# Altium PCB sample.PcbDoc (part 1 of 2)
Units mm, origin at the board's own origin, x right, y up, seen from the top; angles counter-clockwise.
Board outline 130.3 x 75.3 mm, 2 copper layers (Top Layer, Bottom Layer); 117 components, 130 nets, 510 pads, 338 vias.
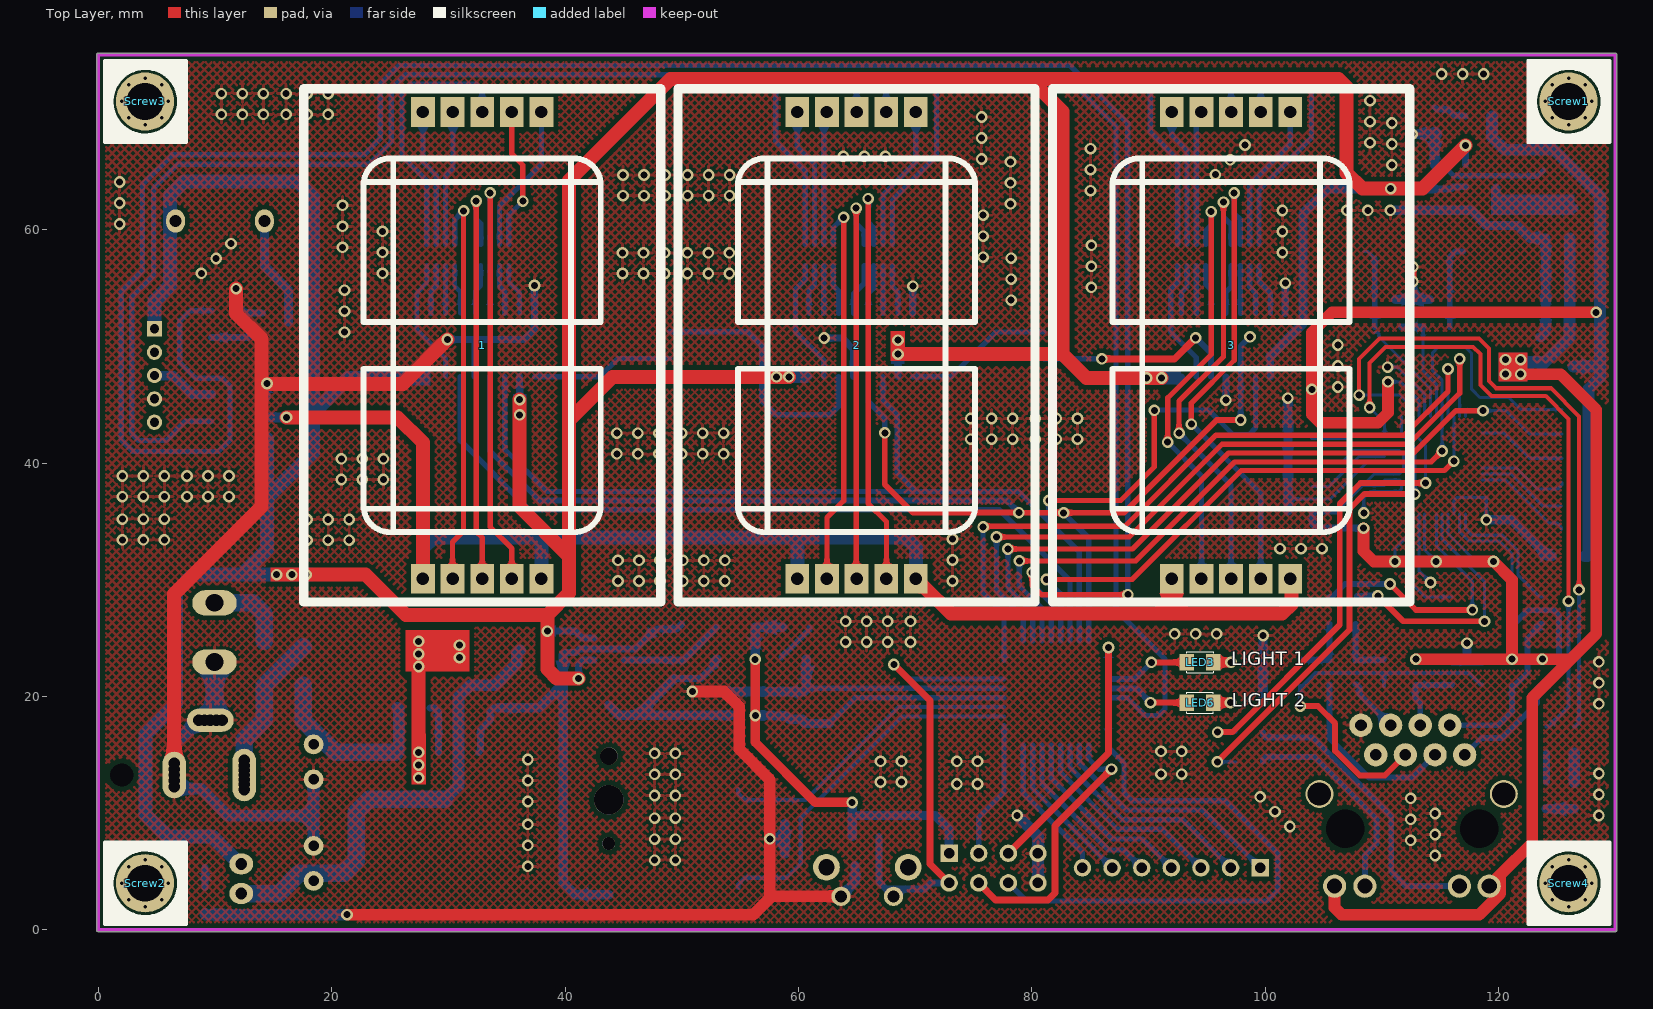
[diagram p0: Top Layer view]
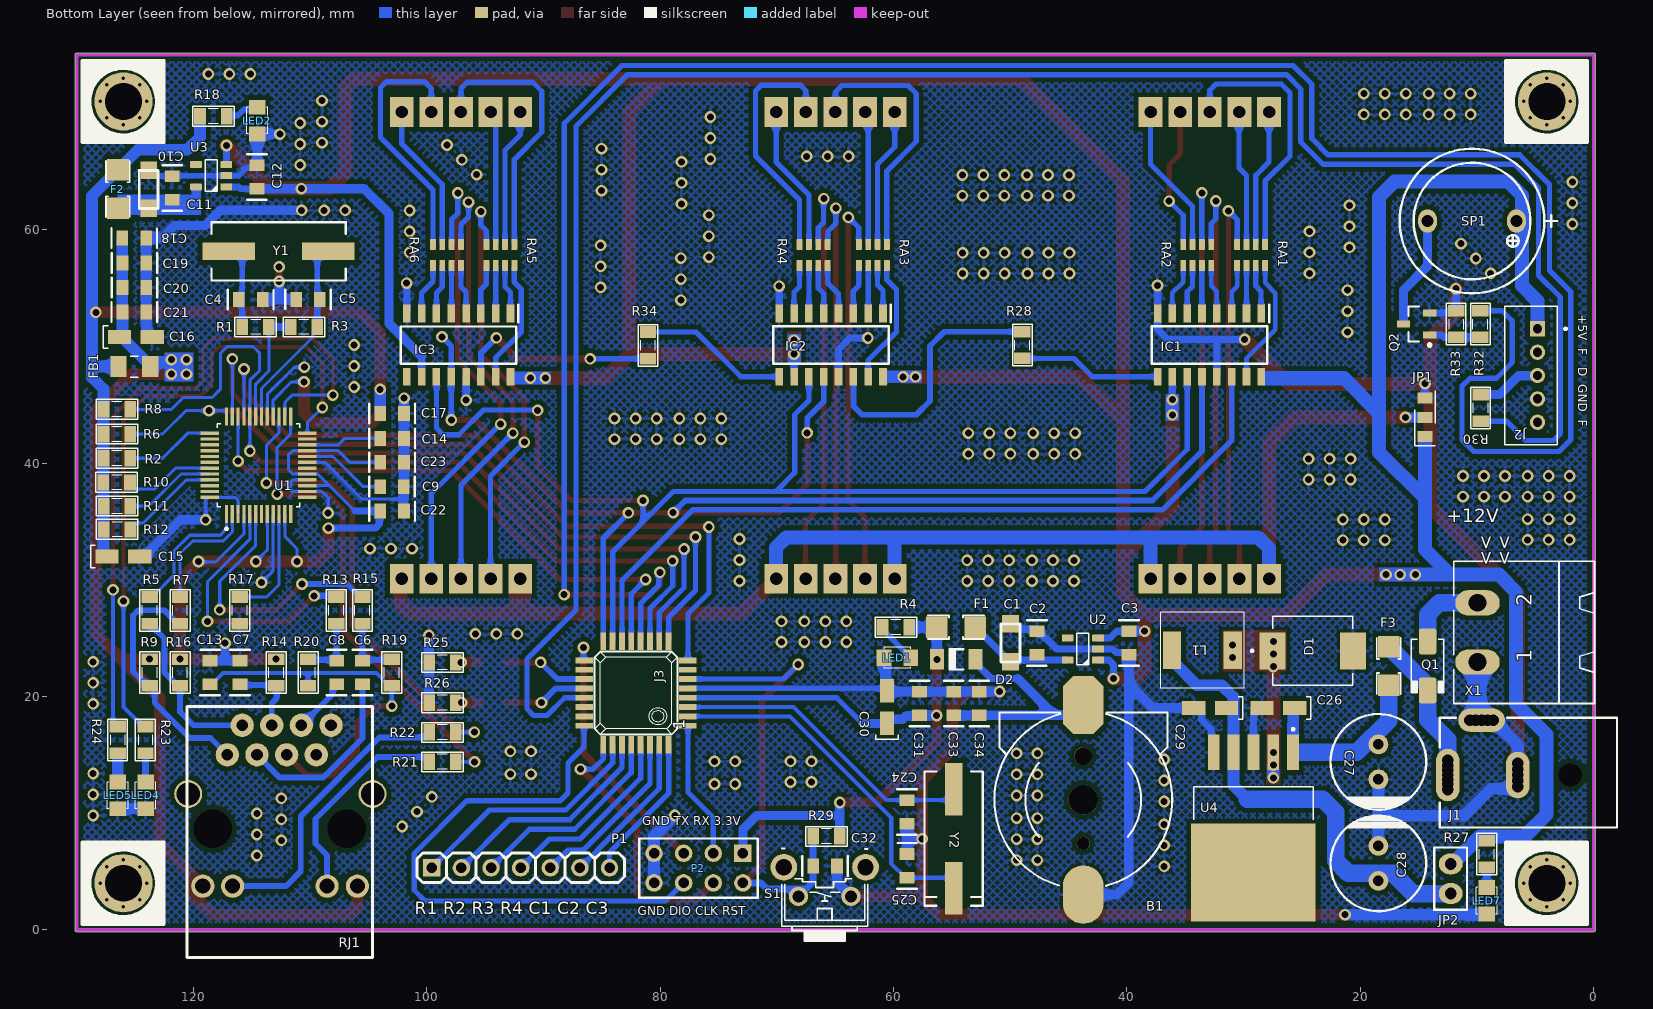
[diagram p1: Bottom Layer view, seen from below]

## Layer stack, top to bottom
Top Solder: solder mask 0.0102, Solder Resist, Dk 3.5
Top Layer: signal copper 0.0356
Dielectric 1: dielectric 0.32, FR-4, Dk 4.8
Bottom Layer: signal copper 0.0356
Bottom Solder: solder mask 0.0102, Solder Resist, Dk 3.5

## Board outline
0,-0.15 cw(c0,0) -0.15,0 -0.15,75 cw(c0,75) 0,75.15 130,75.15 cw(c130,75) 130.15,75 130.15,0 cw(c130,0) 130,-0.15

## Design rules (kind name [scope] priority, off if disabled: settings)
Clearance polygon [InPolygon] p1: gap=0.4 ignorepadtopadclearanceinfootprint=FALSE
Clearance [All] p2: gap=0.2 ignorepadtopadclearanceinfootprint=FALSE except(0: Arc-Hole Track-Hole SMDPad-Hole THPad-Hole Via-Hole Fill-Hole Poly-Hole Region-Hole Text-Hole)
PolygonConnect [All] p1: connectstyle=Relief reliefconductorwidth=0.254 reliefentries=4 polygonreliefangle="90 Angle" airgapwidth=0.254
RoutingVias [All] p1: holewidth=0.6 width=1 viastyle="Through Hole" minholewidth=0.5 minwidth=1 maxholewidth=0.6 maxwidth=1.27
SolderMaskExpansion [All] p1: expansion=0.102 istentingtop=FALSE
SupplyNets "Schematic Supply Nets_10" [InNet('COM')] p1: voltage=0.000
SupplyNets "Schematic Supply Nets_9" [InNet('FB')] p2: voltage=0.000
SupplyNets "Schematic Supply Nets_8" [InNet('+3.3v')] p3: voltage=0.000
SupplyNets "Schematic Supply Nets_7" [InNet('3.3A')] p4: voltage=0.000
SupplyNets "Schematic Supply Nets_4" [InNet('+3.3')] p5: voltage=0.000
SupplyNets "Schematic Supply Nets_3" [InNet('GND')] p6: voltage=0.000
SupplyNets "Schematic Supply Nets_2" [InNet('+5')] p7: voltage=0.000
SupplyNets "Schematic Supply Nets" [InNet('+12')] p8: voltage=0.000
Width [All] p1: maxlimit=2 minlimit=0.254 preferedwidth=0.6
30 further rules are at their usual default settings.

## Components (designator, comment, footprint, x,y, rotation, side; value= is the part's Value field where it differs from the comment)
1 "7Seg 1Digit - THD - Com Anode - Red - 44x30mm - 15011BS/BH" "LED 7SEG 30x44" 32.895,50.1 r0 top locked
2 "7Seg 1Digit - THD - Com Anode - Red - 44x30mm - 15011BS/BH" "LED 7SEG 30x44" 64.98,50.1 r0 top locked
3 "7Seg 1Digit - THD - Com Anode - Red - 44x30mm - 15011BS/BH" "LED 7SEG 30x44" 97.08,50.1 r0 top locked
B1 "Batt Holder CR1220 - 1 Cell - Pressure Contacts 12.5mm - SMD" my_smd_bat 43.836,11.024 r180 bottom locked
C1 "Cap Tantal - 100nF - 6V size A" MY_CAP_SMD-A 49.977,24.592 r90 bottom value=3300u
C2 "Cap 1uF - 50V - 10% - 0805 - Samsung Electronics" C0805 47.71,24.592 r270 bottom value=33p
C3 "Cap 1uF - 50V - 10% - 0805 - Samsung Electronics" C0805 39.832,24.592 r90 bottom value=33p
C4 "Cap 22pF - 50V - 5% - 0805 - CCTC" C0805 115.093,54.029 r180 bottom value=33p
C5 "Cap 22pF - 50V - 5% - 0805 - CCTC" C0805 110.182,54.029 r0 bottom value=33p
C6 "Cap 6.8nF - 50V - 10% - 0805 - Fenghua" C0805 105.523,22.062 r90 bottom value=33p
C7 "Cap 22nF - 50V - 10% - 0805 - Fenghua" C0805 116.026,22.062 r90 bottom value=33p
C8 "Cap 6.8nF - 50V - 10% - 0805 - Fenghua" C0805 107.728,22.062 r90 bottom value=33p
C9 "Cap 4.7uF - 50V - 10% - 0805 - TDK" C0805 102.983,37.985 r0 bottom value=33p
C10 "Cap Tantal - 100nF - 6V size A" MY_CAP_SMD-A 123.85,63.475 r90 bottom value=3300u
C11 "Cap 1uF - 50V - 10% - 0805 - Samsung Electronics" C0805 121.825,63.59 r270 bottom value=33p
C12 "Cap 1uF - 50V - 10% - 0805 - Samsung Electronics" C0805 114.548,64.525 r270 bottom value=33p
C13 "Cap 10nF - 50V - 10% - 0805 - Fenghua" C0805 118.585,22.062 r90 bottom value=33p
C14 "Cap 10nF - 50V - 10% - 0805 - Fenghua" C0805 102.976,42.115 r0 bottom value=33p
C15 "Cap Tantal - 10uF - 6V size A" "CAPP 1206 (3216X18L) Size A" 127.414,32.019 r180 bottom value=10uF
C16 "Cap Tantal - 10uF - 6V size A" "CAPP 1206 (3216X18L) Size A" 126.336,50.795 r180 bottom value=10uF
C17 "Cap 100nF - 50V - 10% - 0805 - Samsung Electronics" C0805 102.973,44.27 r180 bottom value=33p
C18 "Cap 100nF - 50V - 10% - 0805 - Samsung Electronics" C0805 125.076,59.291 r180 bottom value=33p
C19 "Cap 100nF - 50V - 10% - 0805 - Samsung Electronics" C0805 125.062,57.17 r180 bottom value=33p
C20 "Cap 100nF - 50V - 10% - 0805 - Samsung Electronics" C0805 125.061,55.054 r180 bottom value=33p
C21 "Cap 100nF - 50V - 10% - 0805 - Samsung Electronics" C0805 125.068,52.969 r180 bottom value=33p
C22 "Cap 100nF - 50V - 10% - 0805 - Samsung Electronics" C0805 102.978,35.908 r180 bottom value=33p
C23 "Cap 100nF - 50V - 10% - 0805 - Samsung Electronics" C0805 102.977,40.078 r180 bottom value=33p
C24 "Cap 22pF - 50V - 5% - 0805 - CCTC" C0805 58.839,10.106 r270 bottom value=33p
C25 "Cap 22pF - 50V - 5% - 0805 - CCTC" C0805 58.839,5.486 r90 bottom value=33p
C26 "TANTALUM CAPACITOR 100NF 35V 10% SMD A" "CAPP 1206 (3216X18L) Size A" 25.617,19.028 r0 bottom value=100nF
C27 "470UF 16V-6.3*12-105C-BLACK" Cap-Ele-03. 18.445,14.401 r270 bottom value=470uF
C28 "470UF 16V-6.3*12-105C-BLACK" Cap-Ele-03. 18.445,5.699 r90 bottom value=470uF
C29 "TANTALUM CAPACITOR 100NF 35V 10% SMD A" "CAPP 1206 (3216X18L) Size A" 31.464,19.028 r0 bottom value=100nF
C30 "Cap Tantal - 22uF - 6V size A" "CAPP 1206 (3216X18L) Size A" 60.55,17.7 r90 bottom value=22uF
C31 "Cap 100nF - 50V - 10% - 0805 - Samsung Electronics" C0805 57.775,19.4 r90 bottom value=33p
C32 "Cap 1nF - 50V - 10% - 0805" C0805 65.869,5.486 r180 bottom value=33p
C33 "Cap 100nF - 50V - 10% - 0805 - Samsung Electronics" C0805 54.841,19.4 r90 bottom value=33p
C34 "Cap 1uF - 50V - 10% - 0805 - Samsung Electronics" C0805 52.654,19.4 r90 bottom value=33p
D1 "SS34 SM5822 SMC" DIOM7959X265N 24.07,23.911 r180 bottom
D2 "1N4148" LL4148 54.643,23.188 r0 bottom
F1 "F=1.0 A" "1206 FUSE" 54.643,25.937 r0 bottom
F2 "F=1.0 A" "1206 FUSE" 126.473,63.483 r90 bottom
F3 "F=1.0 A" "1206 FUSE" 17.563,22.619 r270 bottom
FB1 "Ferrite Beads 220Ω 2A 0805 25% - Murata Manufacturing" BEADC3216X130N 125.061,48.286 r180 bottom
IC1 "74HC595D" SOIC127P600X175-16N 32.925,50.125 r270 bottom locked
IC2 "74HC595D" SOIC127P600X175-16N 65.35,50.125 r270 bottom locked
IC3 "74HC595D" SOIC127P600X175-16N 97.275,50.113 r270 bottom locked
J1 "Conn DC005-2.5 - Right-Angle DC Power Receptacle - THD" "Power Jack" -2,13.275 r0 bottom
J2 "Conn B5B-PH-K-S" JST_B5B-PH-K-S 5.355,47.512 r90 bottom
J3 "IC MCU - STM32G070KBT - SMD - LQFP-32 - STMicroelectronics" QFP32_STM32 82.075,20.3 r90 bottom
JP1 "Jumper" "Jumper Selector SMD" 14.45,43.925 r90 bottom
JP2 "PIN HEADER 1*2 MALE ST 2.54MM" "Jumper Small - 2.54 - GRAY" 12.244,4.386 r90 bottom
L1 "INDUCTOR TMPC0603H 33UH 7.3*6.6*2.8 SMD" PCBComponent_1 33.404,23.909 r0 bottom
LED1 "LED Red - 0805 - XINGLIGHT" LED-0805-Red 58.52,23.334 r0 bottom value="LED 3 - 5 ly 2 Colour"
LED2 "LED Red - 0805 - XINGLIGHT" LED-0805-Red 114.525,70.5 r270 bottom value="LED 3 - 5 ly 2 Colour"
LED3 "LED Red - 0805 - XINGLIGHT" LED-0805-Green 93.273,22.937 r0 top value="LED 3 - 5 ly 2 Colour"
LED4 "LED Red - 0805 - XINGLIGHT" LED-0805-Red 124.103,12.674 r270 bottom value="LED 3 - 5 ly 2 Colour"
LED5 "LED Green - 0805 - XINGLIGHT" LED-0805-Red 126.494,12.674 r270 bottom value="LED 3 - 5 ly 2 Colour"
LED6 "LED Green - 0805 - XINGLIGHT" LED-0805-Blue 93.273,19.477 r0 top value="LED 3 - 5 ly 2 Colour"
LED7 "LED SMD 0805 RED" LED-0805-Red 9.15,3.644 r270 bottom value="LED 3 - 5 ly 2 Colour"
P1 "Conn PinHeader - 1x7 - 2.54mm  - THD" MHDR1X07-254P 99.58,5.325 r180 bottom
P2 "Conn PinHeader Female - 2x4 - 2.54mm - THD" HDR2X4 72.91,6.565 r0 bottom
Q1 "Diode Schottky - SS14 - SMA - Jingdao Microelectronics" DO-214AC 14.224,22.619 r270 bottom
Q2 "Trans NPN - 2SC945 - SOT-23" SOT23_BEC_N 15.171,51.925 r0 bottom
R1 "Res 0ohm - 5% - 0805" RES-SMD-0805 114.679,51.679 r180 bottom
R2 "Res 10K - 1% - 0805" RES-SMD-0805 126.567,40.421 r180 bottom
R3 "Res 1M - 1% - 0805" RES-SMD-0805 110.532,51.679 r180 bottom
R4 "Res 2.2K - 5% - 0805" RES-SMD-0805 59.798,25.937 r180 bottom
R5 "Res 33ohm - 1% - 0805" RES-SMD-0805 123.751,27.387 r90 bottom
R6 "Res 10K - 1% - 0805" RES-SMD-0805 126.567,42.492 r0 bottom
R7 "Res 33ohm - 1% - 0805" RES-SMD-0805 121.15,27.387 r90 bottom
R8 "Res 10K - 1% - 0805" RES-SMD-0805 126.567,44.611 r0 bottom
R9 "Res 49.9ohm - 1% - 0805" RES-SMD-0805 123.751,22.062 r90 bottom
R10 "Res 10K - 1% - 0805" RES-SMD-0805 126.578,38.343 r0 bottom
R11 "Res 10K - 1% - 0805" RES-SMD-0805 126.553,36.318 r0 bottom
R12 "Res 10K - 1% - 0805" RES-SMD-0805 126.54,34.313 r0 bottom
R13 "Res 33ohm - 1% - 0805" RES-SMD-0805 107.764,27.387 r90 bottom
R14 "Res 10ohm - 1% - 0805" RES-SMD-0805 112.907,22.062 r90 bottom
R15 "Res 33ohm - 1% - 0805" RES-SMD-0805 105.523,27.387 r90 bottom
R16 "Res 49.9ohm - 1% - 0805" RES-SMD-0805 121.15,22.062 r90 bottom
R17 "Res 12.4K - 1% - 0805" RES-SMD-0805 116.037,27.387 r270 bottom
R18 "Res 2.2K - 5% - 0805" RES-SMD-0805 118.3,69.725 r0 bottom
R19 "Res 49.9ohm - 1% - 0805" RES-SMD-0805 103.007,22.062 r90 bottom
R20 "Res 49.9ohm - 1% - 0805" RES-SMD-0805 110.192,22.062 r90 bottom
R21 "Res 330ohm - 1% - 0805" RES-SMD-0805 98.663,14.404 r180 bottom
R22 "Res 330ohm - 1% - 0805" RES-SMD-0805 98.663,16.931 r180 bottom
R23 "Res 1K - 1% - 0805" RES-SMD-0805 124.116,16.286 r270 bottom
R24 "Res 1K - 1% - 0805" RES-SMD-0805 126.494,16.286 r270 bottom
R25 "Res 220ohm - 5% - 0805" RES-SMD-0805 98.663,22.924 r180 bottom
R26 "Res 220ohm - 5% - 0805" RES-SMD-0805 98.663,19.477 r180 bottom
R27 "RESISTOR 1KOHMS 0805 1% SMD" RES-SMD-0805 9.15,6.5 r270 bottom
R28 "Res 0ohm - 5% - 0805" RES-SMD-0805 48.967,50.125 r90 bottom locked
R29 "Res 4.7K - 5% - 0805 - VO Sub Brand (ER)" RES-SMD-0805 65.751,8.015 r180 bottom
R30 "Res 0ohm - 5% - 0805" RES-SMD-0805 9.686,44.743 r270 bottom
R32 "Res 4.7K - 5% - 0805 - VO Sub Brand (ER)" RES-SMD-0805 9.711,51.925 r90 bottom
R33 "Res 47K - 5% - 0805 - VO Sub Brand (ER)" RES-SMD-0805 11.779,51.925 r270 bottom
R34 "Res 0ohm - 5% - 0805" RES-SMD-0805 81.038,50.1 r270 bottom locked
RA1 "Res 220ohm Array - 4Pack - SMD" RESCAXS50P160X320X70-8N 29.35,57.85 r90 bottom value=220ohm
RA2 "Res 220ohm Array - 4Pack - SMD" RESCAXS50P160X320X70-8N 33.975,57.85 r90 bottom value=220ohm
RA3 "Res 220ohm Array - 4Pack - SMD" RESCAXS50P160X320X70-8N 61.775,57.85 r90 bottom value=220ohm
RA4 "Res 220ohm Array - 4Pack - SMD" RESCAXS50P160X320X70-8N 66.85,57.85 r90 bottom value=220ohm
RA5 "Res 220ohm Array - 4Pack - SMD" RESCAXS50P160X320X70-8N 93.7,57.85 r90 bottom value=220ohm
RA6 "Res 220ohm Array - 4Pack - SMD" RESCAXS50P160X320X70-8N 98.275,57.85 r90 bottom value=220ohm
RJ1 "Conn Ethernet RJ-45 - HR911105A - Single - Right Angle - HanRun" MY_rj45_8PIN 121.15,32.45 r0 bottom locked
S1 "Switch Tactile KFC - THD- 4pin - 6*6*9.5 - RA" THT_ALPS_SKHHLMA010 65.9,2.875 r180 bottom
Screw1 "NC" Screw 126,71 r0 top locked
Screw2 "NC" Screw 4,4 r0 top locked
Screw3 "NC" Screw 4,71 r0 top locked
Screw4 "NC" Screw 126,4 r0 top locked
SP1 "Buzzer Piezo TMB12A05 - 5V - 9mm - THD - Active" "BUZZER 7.62mm DC" 10.425,60.75 r0 bottom locked
U1 "IC Ethernet - W5500 - LQFP-48 - WIZnet" QFP50P900X900X160-48N 114.425,39.825 r90 bottom locked
U2 "Reg - SMD - TLV74333PDBVR - 3.3V - SOT-23-5 - Texas Instruments" SOT23-5 43.782,24.067 r0 bottom
U3 "Reg - SMD - TLV74333PDBVR - 3.3V - SOT-23-5 - Texas Instruments" SOT23-5 118.485,64.64 r0 bottom
U4 "LM2596S-5V/NOPB" CONV_LM2596DSADJG 29.158,8.733 r270 bottom
X1 "CON_Phoenix_MSTBA_02" CON_MSTBA02 9.95,25.49 r90 bottom
Y1 "Crystal 25MHz - HC-49SMD - SMD" "Crystal SMD"#1 112.707,58.154 r180 bottom value="12 MHz"
Y2 "Crystal 8MHz - HC-49S - SMD - YXC" "Crystal SMD"#2 54.841,7.258 r90 bottom value="11.0592 MHz"

## Footprints (in the part's own frame and the unit in brackets; to place one, negate y for a bottom-side part, rotate by r counter-clockwise, add the part's x,y. Pads: shape width x height; smd on the part's side, far side on the other; paste and mask are expansions set on the pad)
"1206 FUSE" [mm] "Fast Acting Smd 1206 non-Resettable Fuse Chip For Pcb Board-Design:Abbas Basereh"
  rect 1.85x1.85 smd: 1(-1.65,0) 2(1.65,0)
  silkscreen extent -2.41,-1.02 2.41,1.02, body extent -1.6,-0.8 1.6,0.8, height 1
BEADC3216X130N [mm]
  rect 1.4x1.82 smd: 1(-1.36,0) 2(1.36,0)
  silkscreen extent -0.34,-0.9 0.34,0.9
"BUZZER 7.62mm DC" [mm] "BUZZER 12mm DIA , 7.62mm pitch DESIGNER ABBAS BASEREH"
  oval 1.6x2 hole 1: 1(-3.81,0) 2(3.81,0)
  silkscreen extent -7.3,-6.2 6.2,6.2, body extent -6,-6 6,6, height 9.5
C0805 [mm] "Chip Resistor; Body 2.0 x 1.3 mm (LxW typ)"
  rect 1x1.27 smd: 1(-1.016,0) 2(1.016,0)
  silkscreen extent -1.96,-0.84 1.96,0.84, body extent -1,-0.62 1,0.63, height 0.78
Cap-Ele-03. [mm]
  round 1.7 hole 0.9: 1(-1.5,0) 2(1.5,0)
  silkscreen extent -4.1,-4.1 4.1,4.1, body extent -4.1,-4.1 4.1,4.1, height 14.65
"CAPP 1206 (3216X18L) Size A" [mm] "Chip Capacitor, 2-Leads, Body 3.2x1.6mm, IPC High Density, chip Tantalum"
  rect 1.999x1.199 smd: 1(0,0) 2(2.8,0)
  silkscreen extent -1.38,-0.97 -0.99,0.97, body extent -0.43,-0.9 3.21,0.9, height 1.8
CON_MSTBA02 [mil]
  oval 85x150 hole 60: 1(-100,0) 2(100,0)
  silkscreen extent -240,-395 240,80, body extent -240,-392 239,80, height 340
CONV_LM2596DSADJG [mm]
  rect 3.05x1.016 smd: 1(-6.485,3.404) 2(-6.485,1.702) 3(-6.485,0) 4(-6.485,-1.702) 5(-6.485,-3.404)
  rect 8.38x10.66 smd paste-6: 6(3.82,0)
  silkscreen extent -8.56,-5.12 -0.69,5.12, body extent -7.1,-5.07 7.1,5.07, height 4.57
"Crystal SMD"#1 [mm] "DESIGNER ABBAS BASEREH"
  rect 4.5x1.5 smd: 1(-4.25,0) 2(4.25,0)
  silkscreen extent -5.75,-2.5 5.75,2.5, body extent -6.21,-2.25 6.09,2.25, height 5.18
"Crystal SMD"#2 [mm]
  rect 4.5x1.5 smd: 1(-3.683,0) 2(4.817,0)
  silkscreen extent -5.18,-2.5 6.32,2.5, body extent -5.64,-2.25 6.66,2.25, height 5.18
DIOM7959X265N [mm]
  rect 2.25x3.18 smd: A(3.455,0) C(-3.455,0)
  silkscreen extent -5.3,-2.95 3.44,2.95, body extent -3.98,-2.95 3.98,2.95, height 1.2
DO-214AC [mm] "JEDEC DO214 variation AC. SMA"
  round 0.508 on Mech15: 0(0,0)
  rrect25% 2.2x1.5 smd: A(-2.1,0) K(2.1,0)
  silkscreen extent -2.3,-1.4 2.3,1.4, body extent -2.6,-1.3 2.6,1.3, height 2.42
HDR2X4 [mm] "Connector; Header; 4x2 Position"
  rect 1.5x1.5 hole 0.9: 1(0,0)
  round 1.5 hole 0.9: 2(0,2.54) 3(2.54,0) 4(2.54,2.54) 5(5.08,0) 6(5.08,2.54) 7(7.62,0) 8(7.62,2.54)
  silkscreen extent -1.27,-1.27 8.89,3.81
JST_B5B-PH-K-S [mm]
  rect 1.308x1.308 / inner round 1.308 / far side rect 1.308x1.308 hole 0.8: 1(4,-0.55)
  round 1.308 hole 0.8: 2(2,-0.55) 3(0,-0.55) 4(-2,-0.55) 5(-4,-0.55)
  silkscreen extent -5.95,-3.05 5.95,2.25
"Jumper Selector SMD" [mm]
  rect 0.95x1.3 smd: 1(-1.65,0) 2(0,0) 3(1.65,0)
  silkscreen extent -2.41,-0.89 2.29,0.89, body extent -1.85,-0.64 0.18,0.64, height 0.6
"Jumper Small - 2.54 - GRAY" [mil]
  oval 70x80 hole 40: 1(-50,0) 2(50,0)
  silkscreen extent -105,-55 105,55, body extent -100,-50 100,50, height 337
"LED 7SEG 30x44" [mil]
  rect 80x100 hole 42: 1(-200,-787.4) 2(-100,-787.4) 3(0,-787.4) 4(100,-787.4) 5(200,-787.4) 6(200,787.4) 7(100,787.4) 8(0,787.4) 9(-100,787.4) 10(-200,787.4)
  silkscreen extent -602,-866 602,866, body extent -602,-866 602,866, height 354
LED-0805-Blue [mil]
  rect 50x55 smd: 1(0,0) 2(90,0)
  silkscreen extent 0,-35 90,35, body extent 5,-25 85,25, height 43
LED-0805-Green [mil]
  rect 50x55 smd: 1(0,0) 2(90,0)
  silkscreen extent 0,-35 90,35, body extent 5,-25 85,25, height 43
LED-0805-Red [mil]
  rect 50x55 smd: 1(0,0) 2(90,0)
  silkscreen extent 0,-35 90,35, body extent 5,-25 85,25, height 43
LL4148 [mm] "MELF Diode, 2-Leads, Body 3.5x1.4mm, IPC Medium Density"
  rect 1.2x1.75 smd: 1(-1.65,0) 2(1.65,0)
  silkscreen extent -0.61,-0.87 0.57,0.88, body extent -1.78,-0.75 1.72,0.75, height 1.55
MHDR1X07-254P [mm] "Male Header 1X07 with 2.54 mm Pitch"
  rect 1.5x1.5 hole 0.9: 1(0,0)
  round 1.5 hole 0.9: 2(2.54,0) 3(5.08,0) 4(7.62,0) 5(10.16,0) 6(12.7,0) 7(15.24,0)
  silkscreen extent -1.27,-1.27 16.51,1.27, body extent -1.27,-1.27 16.51,1.27, height 8.43
MY_CAP_SMD-A [mm] "1.6X3.25"
  rect 1.5x1.42 smd: +(-1.63,0) -(1.63,0)
  silkscreen extent -1.63,-0.8 1.62,0.8, body extent -1.64,-0.8 1.54,0.8, height 1.77
MY_rj45_8PIN [mm]
  round 2 hole 1: 1(-4.05,17.45) 2(-5.32,14.91) 3(-6.59,17.45) 4(-7.86,14.91) 5(-9.13,17.45) 6(-10.4,14.91) 7(-11.67,17.45) 8(-12.94,14.91)
  round 2 hole 1.3: 9(-1.95,28.7) 10(-4.5,28.7) 11(-12.6,28.7) 12(-15.2,28.7)
  round 2.4 hole 2: ""(-16.5,20.8) ""(-0.7,20.8)
  round 3 hole 3.3: ""(-14.3,23.8) ""(-2.8,23.8)
  silkscreen extent -16.5,13.3 -0.6,34.8, body extent -16.5,13.35 -0.62,34.75, height 13.5
my_smd_bat [mm]
  round 1.5 hole 1.5: 0(0.075,3.872)
  round 1.1 hole 1.1: 0(0.1,-3.628)
  round 2.54 hole 2.54: 0(0.1,0.122)
  oct 3.5x5 smd: 1(0.1,8.25)
  oval 3.5x5 smd: 2(0.1,-8.006)
  silkscreen extent -7.52,-7.24 7.72,7.62, body extent -7.27,-10.1 7.47,9.1, height 4.25
PCBComponent_1 [mm]
  rect 1.55x3.2 smd: 1(-2.475,-0.05) 2(2.725,-0.05)
  silkscreen extent -3.45,-3.3 3.7,3.2, body extent -3.45,-3.3 3.7,3.2, height 3
"Power Jack" [mm] "Power Adaptor Jack"
  round 1.5 hole 1: 1(14.5,-0.8) 1(14.5,-0.4) 1(14.5,0.4) 1(14.5,0.8) 1(14.5,-1.25) 1(14.5,1.25) 2(8.5,-1) 2(8.5,1) 2(8.5,-0.5) 2(8.5,0.5) 3(10.6,-4.7) 3(11.1,-4.7) 3(12.1,-4.7) 3(12.6,-4.7)
  oval 2x4.5 hole 1: 1(14.5,0)
  oval 2x4 hole 1: 2(8.5,0)
  oval 4x2 hole 1: 3(11.6,-4.7)
  round 1.9 hole 2: MH(4,0)
  silkscreen extent 0,-4.9 15.2,4.5, body extent 0,-4.9 15.2,4.5, height 11
QFP32_STM32 [mm]
  rect 0.5x1.5 smd: 1(-2.8,-4.45) 2(-2,-4.45) 3(-1.2,-4.45) 4(-0.4,-4.45) 5(0.4,-4.45) 6(1.2,-4.45) 7(2,-4.45) 8(2.8,-4.45) 17(2.8,4.45) 18(2,4.45) 19(1.2,4.45) 20(0.4,4.45) 21(-0.4,4.45) 22(-1.2,4.45) 23(-2,4.45) 24(-2.8,4.45)
  rect 1.5x0.5 smd: 9(4.45,-2.8) 10(4.45,-2) 11(4.45,-1.2) 12(4.45,-0.4) 13(4.45,0.4) 14(4.45,1.2) 15(4.45,2) 16(4.45,2.8) 25(-4.45,2.8) 26(-4.45,2) 27(-4.45,1.2) 28(-4.45,0.4) 29(-4.45,-0.4) 30(-4.45,-1.2) 31(-4.45,-2) 32(-4.45,-2.8)
  silkscreen extent -3.55,-3.55 3.55,3.55, body extent -4.5,-4.5 4.5,4.5, height 0.72
QFP50P900X900X160-48N [mm]
  rect 1.56x0.28 smd: 1(-4.18,2.75) 2(-4.18,2.25) 3(-4.18,1.75) 4(-4.18,1.25) 5(-4.18,0.75) 6(-4.18,0.25) 7(-4.18,-0.25) 8(-4.18,-0.75) 9(-4.18,-1.25) 10(-4.18,-1.75) 11(-4.18,-2.25) 12(-4.18,-2.75) 25(4.18,-2.75) 26(4.18,-2.25) 27(4.18,-1.75) 28(4.18,-1.25) 29(4.18,-0.75) 30(4.18,-0.25) 31(4.18,0.25) 32(4.18,0.75) 33(4.18,1.25) 34(4.18,1.75) 35(4.18,2.25) 36(4.18,2.75)
  rect 0.28x1.56 smd: 13(-2.75,-4.18) 14(-2.25,-4.18) 15(-1.75,-4.18) 16(-1.25,-4.18) 17(-0.75,-4.18) 18(-0.25,-4.18) 19(0.25,-4.18) 20(0.75,-4.18) 21(1.25,-4.18) 22(1.75,-4.18) 23(2.25,-4.18) 24(2.75,-4.18) 37(2.75,4.18) 38(2.25,4.18) 39(1.75,4.18) 40(1.25,4.18) 41(0.75,4.18) 42(0.25,4.18) 43(-0.25,4.18) 44(-0.75,4.18) 45(-1.25,4.18) 46(-1.75,4.18) 47(-2.25,4.18) 48(-2.75,4.18)
  silkscreen extent -5.55,-3.55 3.55,3.55
RES-SMD-0805 [mil]
  rect 39.37x55 smd: 1(-45,0) 2(45,0)
  silkscreen extent -70,-34 70,33, body extent -39,-25 39,25, height 31
RESCAXS50P160X320X70-8N [mm] "Resistor Pack, Body 1.6x3.2mm, 4x0603, IPC Medium Density"
  round 0.254 on Mech15: 0(0,0)
  rrect25% 0.95x0.5 smd: 1(-0.9,1.2) 2(-0.9,0.4) 3(-0.9,-0.4) 4(-0.9,-1.2) 5(0.9,-1.2) 6(0.9,-0.4) 7(0.9,0.4) 8(0.9,1.2)
  Top Layer pour cut-out: -0.4,1.7 0.4,1.7 0.4,-1.7 -0.4,-1.7
  body extent -0.87,-1.68 0.88,1.67, height 0.7
Screw [mm]
  round 0.6 hole 0.3: S(-2,0) S(-1.414,-1.414) S(-1.414,1.414) S(0,-2) S(0,2) S(1.414,-1.414) S(1.414,1.414) S(2,0)
  round 5 hole 3.15 mask+0.1: S(0,0)
  silkscreen extent -3.49,-3.53 3.56,3.52, body extent -2.8,-2.8 2.8,2.8, height 3.88
SOIC127P600X175-16N [mm]
  rect 1.525x0.65 smd: 1(-2.712,4.445) 2(-2.712,3.175) 3(-2.712,1.905) 4(-2.712,0.635) 5(-2.712,-0.635) 6(-2.712,-1.905) 7(-2.712,-3.175) 8(-2.712,-4.445) 9(2.712,-4.445) 10(2.712,-3.175) 11(2.712,-1.905) 12(2.712,-0.635) 13(2.712,0.635) 14(2.712,1.905) 15(2.712,3.175) 16(2.712,4.445)
  silkscreen extent -3.47,-4.95 1.6,5.12, body extent -3,-4.95 3,4.95, height 1.75
SOT23-5 [mm]
  round 0.5 on Mech15: 0(0,0)
  rrect25% 1x0.6 smd: 1(-1.3,0.95) 2(-1.3,0) 3(-1.3,-0.95) 4(1.3,-0.95) 5(1.3,0.95)
  silkscreen extent -0.51,-1.35 0.51,1.35, body extent -1.4,-1.45 1.4,1.45, height 1.44
SOT23_BEC_N [mm] "SOT23, 3-Leads, Body 2.9x1.3mm, Pitch 0.95mm, Lead Span 2.4mm, IPC Medium Density"
  rect 1.15x0.6 smd: 1(-1.125,0.95) 2(-1.125,-0.95) 3(1.125,0)
  silkscreen extent -1.25,-1.5 0.7,1.92, body extent -1.23,-1.45 1.07,1.45, height 1
THT_ALPS_SKHHLMA010 [mil] "Horizontal 6.0mm Square Type (Snap-in) SKHH Series; Stem length 3.85 mm ; 1,000,000 cycles ; 0.98N Force"
  round 65 hole 40: 1(-88.58,0) 2(88.58,0)
  round 90 hole 55: MH(-137.8,98.43) MH(137.8,98.43)
  silkscreen extent -145,-152 145,161, body extent -167,-152 167,159, height 292

## Part data
1 2 3: library part "LED 7SEG", "7SEGMENT 1DIGIT ANODE RED 44x30 15011BS/BH"
B1: library part "BATT SMD", "BATT"
C1 C10: library part CAP_TANTAL_A, "Tantalum SMA"
C2 C3 C4 C5 C6 C7 C8 C9 C11 C12 C13 C14 C17 C18 C19 C20 C21 C22 C23 C24 C25 C31 C32 C33 C34: library part CapSMD, "CAP 0805", LatestRevisionDate=17-Jul-2002, LatestRevisionNote="Re-released for DXP Platform.", PackageReference=RAD-0.3, Published=8-Jun-2000, Publisher="Altium Limited"
C15 C16 C30: library part Cap-Polar, "Polar Capacitor", Voltage=6V, Adding Date=1387/12/20, Designer="Saeid Jorablo", Organazation=ControTec
C26 C29: library part Cap-Polar, "Polar Capacitor", Voltage=16V, Adding Date=1387/12/20, Designer="Saeid Jorablo", Organazation=ControTec
C27 C28: library part Capacitor_Ele., "Capacitor_Ele", Voltage=16v, LatestRevisionDate=17-Jul-2002, LatestRevisionNote="Re-released for DXP Platform.", Publisher="Altium Limited"
D1: library part SS34, "Diode Schottky 40 V 3A Surface Mount SMC (DO-214AB)", Package="SMC-2 ON Semiconductor", Availability="In Stock", Check_prices=https://www.snapeda.com/parts/SS34/Onsemi/view-part/?ref=eda, MF="ON Semiconductor", MP=SS34, Price=None, SnapEDA_Link=https://www.snapeda.com/parts/SS34/Onsemi/view-part/?ref=snap
D2: library part "Diode 1N4148", "High Conductance Fast Diode", Code_JEDEC=DO-204-AH, ComponentLink1Description="Manufacturer Link", ComponentLink1URL=http://www.fairchildsemi.com/, ComponentLink2Description=Datasheet, ComponentLink2URL=http://www.fairchildsemi.com/ds/1N%2F1N4148.pdf, DatasheetVersion=1997, LatestRevisionDate=17-Jul-2002, LatestRevisionNote="Re-released for DXP Platform.", PackageDescription="Diode, Axial; Body 3.8 x 1.9 mm (LxDia. max), Lead Dia. 0.53 mm (max)", PackageReference=DO-35, Published=8-Jun-2000, Publisher="Altium Limited"
F1 F2 F3: library part "Fuse SMD1206", "SMD Fuses 1206", Data=16-12-2016, Desc.="SMD Fuses 1206", Designer="Abbas Basereh"
FB1: library part BLM31PG601SN1L, "BLM21PG221SN1D", Package="3216 Murata", Availability=Unavailable, MF="Murata Electronics", MP=BLM31PG601SN1L, Price=None, SnapEDA_Link=https://www.snapeda.com/parts/BLM31PG601SN1L/Murata/view-part/262283/?ref=snap
IC1 IC2 IC3: "Shift Register Single 8-Bit Serial to Serial/Parallel 16-Pin SOIC T/R", Package="SOIC-16 ON Semiconductor", Check_prices=https://www.snapeda.com/parts/74HC595D/NXP+Semiconductors/view-part/?ref=eda, MF="NXP Semiconductors", MP=74HC595D, SnapEDA_Link=https://www.snapeda.com/parts/74HC595D/NXP+Semiconductors/view-part/?ref=snap
J1: library part "Power Jack", "Right-Angle DC Power Receptacle 2.5mm 6.3mm 500mA 12V Plugin AC/DC Power Connectors", Adding Date=10/21/2009, Company=Personal, Designer="Saeid Jorablo", Project Name=Laser
J2: library part B5B-PH-K-S, "RFID Reader", Package=None, Availability=Unavailable, MF="{'manufacturer': u'JST Sales America Inc.'}", MP=B5B-PH-K-S, Price=None
J3: library part STM32G030K6T6, Package="LQFP-32 STMicroelectronics", Availability="In Stock", Check_prices=https://www.snapeda.com/parts/STM32G030K6T6/STMicroelectronics/view-part/?ref=eda, MF=STMicroelectronics, MP=STM32G030K6T6, Price=None, Purchase-URL=https://pricing.snapeda.com/search/part/STM32G030K6T6/?ref=eda, SnapEDA_Link=https://www.snapeda.com/parts/STM32G030K6T6/STMicroelectronics/view-part/?ref=snap
JP1: library part "Jumper Selector", "Jumper Selector"
JP2: library part Jumper, "Jumper", Company=E.P.I.L, Defualt State=Close, Design Date=2011/11/02
L1: library part Inductor
LED1 LED2 LED4: library part "LED SMD", "LED RED"
LED3: library part "LED SMD", "LED BLUE SMD"
LED5: library part "LED SMD", "LED GREEN"
LED6: library part "LED SMD", "LED RED SMD"
LED7: library part "LED SMD", "LED RED 0805"
P1: library part MHDR_1X07, "KeyPad"
P2: library part "Header 4X2", "PBD-2.54-2X4GF", LatestRevisionDate=17-Jul-2002, LatestRevisionNote="Re-released for DXP Platform.", Publisher="Altium Limited"
Q1: library part DIODE_SCHOTTKY_10MQ100NPBF, "SS34 Diode", Manufacturer 1="Micro Commercial Co", Manufacturer Part Number 1=SS210-TP, Package / Case="DO-214AC, SMA", Ratings="100V; 3A", Supplier Part Number 1=SS210-TPMSCT-ND, Diode Type=Schottky, Material=Si, Mounting Type="Surface Mount", SCDType=source, Speed="Fast Recovery =< 500ns, > 200mA (Io)", Supplier 1=Digi-Key
Q2: library part NPN_BEC, "2SC945", Company="SJ Libraries", ComponentLink1Description=Datasheet, ComponentLink2Description=Reference, Designer="Eng. Saeid Jorablo", HelpURL=http://s3.picofile.com/file/7443264187/Coming_Soon_logo.gif, LatestRevisionDate=29-May-2009, LatestRevisionNote="IPC-7351 Footprint Added.", Mounting Technology="Surface Mount\Through-Hole", PackageDescription="3-Pin SOT-23 Package 0.95 mm Pitch, 2.4 mm Lead Span", PackageReference=SOT-23B, PackageVersion=Aug-1999, Published=8-Jun-2000, Publisher="SJ Unlimited", Status=Unreleased
R1: library part Res-SMD, Manufacturer="Generic Components", Class=Passive, Published=08/06/2000, Publisher="Altium Hobart Technology Centre"
R2 R3 R4 R5 R6 R7 R8 R9 R10 R11 R12 R13 R14 R15 R16 R17 R18 R19 R20 R21 R22 R23 R24 R25 R26 R27 R28 R29 R30 R32 R33 R34: library part Res-SMD, "RES 0805", Manufacturer="Generic Components", Class=Passive, Published=08/06/2000, Publisher="Altium Hobart Technology Centre"
RA1 RA2 RA3 RA4 RA5 RA6: library part RESPACK_100R_5%_4X, Manufacturer 1=Yageo, Manufacturer 2="Vishay Dale", Manufacturer 3="Stackpole Electronics Inc", Manufacturer 4="Panasonic Electronic Components", Manufacturer Part Number 1=YC164-JR-07100RL, Manufacturer Part Number 2=CRA06S083100RJTA, Manufacturer Part Number 3=RAVF164DJT100R, Manufacturer Part Number 4=EXB-38V101JV, Number of Resistors=4, Operating Temperature="-55°C ~ 155°C", Package / Case="1206 (3216 Metric), Convex", Power Per Element=62.5mW, Ratings="1/16 W", Supplier Device Package="4 x 0603", Supplier Part Number 1=YC164J-100CT-ND, Tolerance=±5%, Circuit Type=Isolated, ComponentLink1Description=http://www.yageo.com/documents/recent/PYu-YC_TC164_51_RoHS_L_3.pdf, ComponentLink1URL=http://www.yageo.com/documents/recent/PYu-YC_TC164_51_RoHS_L_3.pdf, ComponentLink2Description=http://www.vishay.com/doc?31002, ComponentLink2URL=http://www.vishay.com/doc?31002, ComponentLink3Description=http://www.seielect.com/Catalog/SEI-RAVF.pdf, ComponentLink3URL=http://www.seielect.com/Catalog/SEI-RAVF.pdf, ComponentLink4Description=http://industrial.panasonic.com/www-cgi/jvcr13pz.cgi?E+PZ+3+AOC0001+EXB38V101JV+7+WW, ComponentLink4URL=http://industrial.panasonic.com/www-cgi/jvcr13pz.cgi?E+PZ+3+AOC0001+EXB38V101JV+7+WW, Mounting Type="Surface Mount", Number of Pins=8, Parameter Name=±200ppm/°C, RoHS 1="RoHS Compliant", RoHS 2="RoHS Compliant", RoHS 3="RoHS Compliant", RoHS 4="RoHS Compliant", SCDType=source, Size / Dimension="0.126\" L x 0.063\" W (3.20mm x 1.60mm)", Supplier 1=Digi-Key, Supplier 2=Digi-Key, Supplier 3=Digi-Key, Supplier 4=Digi-Key, Supplier Part Number 2=CRA6S8100CT-ND, Supplier Part Number 3=RAVF164DJT100RCT-ND, Supplier Part Number 4=Y9101CT-ND
RJ1: library part rj45-8pin, "RJ45 - HR911105A"
S1: library part SW_PB2, Category=MISC, Company="SJ Libraries", ComponentLink1Description=Datasheet, Designer="Eng. Saeid Jorablo", HelpURL=http://s3.picofile.com/file/7443264187/Coming_Soon_logo.gif, Mounting Technology="Surface Mount\Through-Hole", Pin Count=0, Update Date=6/3/2012
Screw1 Screw2 Screw3 Screw4: library part Screw, "Screw", LatestRevisionDate=17-Jul-2002, LatestRevisionNote="Re-released for DXP Platform.", Publisher="Altium Limited"
SP1: library part "PIEZO BUZZER", Comment_1="SPEAKER AND BEEP", ComponentLink2Description=Reference, Design Date=1395/11/14, Designer="Abbas Basereh", Mounting Technology=THD, PackageDescription=THD, Pin Count=2, Publisher="Abbas Basereh", Status=Unreleased
U1: library part W5500, "W5500", Package=None, Availability=Unavailable, MP=W5500, Price=None
U2 U3: library part TLV70223, Package=SOT23-5, Name=TLV70220PDBVR
U4: library part LM2596DSADJG, "LM2596 - 3.3V", Package="D2PAK-5 ON Semiconductor", Check_prices=https://www.snapeda.com/parts/LM2596DSADJG/Onsemi/view-part/?ref=eda, MF="ON Semiconductor", MP=LM2596DSADJG, SnapEDA_Link=https://www.snapeda.com/parts/LM2596DSADJG/Onsemi/view-part/?ref=snap
X1: Manufacturer="PHOENIX CONTACT", Max Current="12 A", Voltage="320 V", Category=Connector, Company="SJ Libraries", ComponentLink1Description=Datasheet, ComponentLink2Description=Reference, Connector type="PCB Terminal Block", Designer="Eng. Saeid Jorablo", HelpURL=http://s3.picofile.com/file/7443264187/Coming_Soon_logo.gif, Mounting Technology=Through-Hole, Pin Count=2, Positions=2, Publisher="SJ UnLimited", Revision 1="2012/10/1 : Adding Model", Status=Unreleased, Update=2012/10/1
Y1: library part XTAL_Crystal, "X322525MSB4SI", ComponentLink1Description=Datasheet, ComponentLink2Description=Reference, Design Date=2017-1-3, Designer="ABBAS BASEREH", Mounting Technology="Surface Mount\Through-Hole", Status=Unreleased
Y2: library part XTAL_Crystal, "XTAL Crystal", Company="SJ Libraries", ComponentLink1Description=Datasheet, ComponentLink2Description=Reference, Design Date=11/04/2011, Designer="Eng. Saeid Jorablo", HelpURL=http://s3.picofile.com/file/7443264187/Coming_Soon_logo.gif, Mounting Technology="Surface Mount\Through-Hole", Publisher="SJ Unlimited", Status=Unreleased

## Via types
v1: diameter 1, hole 0.6, Top Layer to Bottom Layer, 338 vias

## Nets (pads, with @x,y where several pads share a name; then routed paths per layer and width w, separated by ;. In a path a pad name is that pad's centre, name@x,y a point inside that pad or via, vN(x,y) a via of type N, cw(c..) or ccw(c..) an arc to the next point about the centre after c; other vN are vias at no path point)
3.3A: C16.1 C18.1 C19.1 C20.1 C21.1 C22.1 C23.1 FB1.2 R9.2 R14.2 R16.2 RJ1.9 RJ1.12 U1.4 U1.8 U1.11 U1.15 U1.17 U1.21 | length 164
  Top Layer w1: RJ1.12@105.95,3.75 105.95,1.9 106.55,1.3 118.35,1.3 120.162,3.112 120.162,4.713 ; v1(108.425,34.425) 108.425,32.45 109.3,31.575 v1(111.125,31.575) v1(114.65,31.575) v1(119.575,31.575) 121.15,30 v1(121.15,23.205) ; v1(112.907,23.205) v1(121.15,23.205) ; RJ1.9@119.2,3.75 120.162,4.713 ; v1(121.9,47.625) 125.325,47.625 128.375,44.575 128.375,25.375 126.205,23.205 ; 120.162,4.713 122.9,7.45 122.9,19.9 126.205,23.205 ; v1(121.15,23.205) v1(123.751,23.205) 126.205,23.205
  Bottom Layer w0.26: C23.1@103.993,40.078 106.603,40.078 107.6,41.075 U1.21@110.245,41.075 111.5,41.075 111.875,40.7 111.875,39.45 111.5,39.075 U1.17@110.245,39.075 110.235,39.065 109.34,39.065 106.177,35.902 ; C22.1@103.994,35.908 C22.1@104,35.902 ; 108.375,38.075 U1.15@110.245,38.075 ; v1(111.125,31.575) 111.12,31.58 111.12,32.67 112.175,33.725 U1.11@112.175,35.645 ; U1.8@113.675,35.645 113.675,32.55 v1(114.65,31.575) ; U1.4@115.675,35.645 115.675,33.95 118.1,31.525 119.525,31.525 v1(119.575,31.575)
  Bottom Layer w0.6: C22.1@103.994,35.908 104.07,35.832 104.07,34.776 104.421,34.425 v1(108.425,34.425) ; C22.1@104,35.902 106.177,35.902
  Bottom Layer w1: v1@121.9,48.769 122,48.669 124,48.669 124.515,49.185 ; FB1.2@123.701,48.286 123.701,48.496 123.901,48.696 124.026,48.696 124.515,49.185 ; C21.1@126.084,52.969 126.084,50.754 124.515,49.185 ; C21.1@126.092,52.969 C18.1@126.092,59.291
  other v1: 120.6,47.625 120.6,48.875 121.9,48.875
7SEG1A: IC1.7 RA2.1 | length 4.5
  Bottom Layer w0.4: RA2.1@35.175,56.95 35.175,55.525 36.1,54.6 IC1.7@36.1,52.837
7SEG1B: IC1.6 RA2.2 | length 4.3
  Bottom Layer w0.45: RA2.2@34.375,56.95 34.375,55.15 34.83,54.695 IC1.6@34.83,52.837
7SEG1C: IC1.5 RA2.3 | length 4.1
  Bottom Layer w0.45: IC1.5@33.575,52.852 RA2.3@33.575,56.95
7SEG1D: IC1.4 RA2.4 | length 4.3
  Bottom Layer w0.4: IC1.4@32.29,52.837 32.29,54.715 32.775,55.2 RA2.4@32.775,56.95
7SEG1E: IC1.3 RA1.1 | length 4.3
  Bottom Layer w0.4: RA1.1@30.55,56.95 30.55,55.15 31.02,54.68 IC1.3@31.02,52.837
7SEG1F: IC1.2 RA1.2 | length 4.1
  Bottom Layer w0.45: IC1.2@29.75,52.837 RA1.2@29.75,56.95
7SEG1G: IC1.1 RA1.3 | length 4.3
  Bottom Layer w0.45: IC1.1@28.48,52.837 28.5,52.857 28.5,54.725 28.95,55.175 RA1.3@28.95,56.95
7SEG1P: IC1.15 RA1.4 | length 10.9
  Bottom Layer w0.4: RA1.4@28.15,56.95 28.15,55.45 27.275,54.575 27.275,51.45 29.75,48.975 IC1.15@29.75,47.413
7SEG2A: IC2.7 RA4.1 | length 4.3
  Bottom Layer w0.45: RA4.1@68.05,56.95 68.05,55.125 68.525,54.65 IC2.7@68.525,52.837
7SEG2B: IC2.6 RA4.2 | length 4.1
  Bottom Layer w0.45: RA4.2@67.25,56.95 67.252,56.948 67.252,52.839 IC2.6@67.255,52.837
7SEG2C: IC2.5 RA4.3 | length 4.3
  Bottom Layer w0.45: IC2.5@65.985,52.837 65.985,54.535 66.45,55 RA4.3@66.45,56.95
7SEG2D: IC2.4 RA4.4 | length 4.5
  Bottom Layer w0.45: IC2.4@64.715,52.837 64.715,54.515 65.65,55.45 RA4.4@65.65,56.95
7SEG2E: IC2.3 RA3.1 | length 4.3
  Bottom Layer w0.45: RA3.1@62.975,56.95 62.975,55.225 63.445,54.755 IC2.3@63.445,52.837
7SEG2F: IC2.2 RA3.2 | length 4.1
  Bottom Layer w0.45: IC2.2@62.175,52.837 RA3.2@62.175,56.95
7SEG2G: IC2.1 RA3.3 | length 4.3
  Bottom Layer w0.45: IC2.1@60.905,52.837 60.905,54.805 61.375,55.275 RA3.3@61.375,56.95
7SEG2P: IC2.15 RA3.4 | length 10.9
  Bottom Layer w0.45: RA3.4@60.575,56.95 60.575,55.7 59.75,54.875 59.75,51.25 62.175,48.825 IC2.15@62.175,47.413
7SEG3A: IC3.7 RA6.1 | length 4.5
  Bottom Layer w0.45: RA6.1@99.475,56.95 99.475,55.575 100.45,54.6 IC3.7@100.45,52.825
7SEG3B: IC3.6 RA6.2 | length 4.3
  Bottom Layer w0.45: RA6.2@98.675,56.95 98.675,55.1 99.18,54.595 IC3.6@99.18,52.825
7SEG3C: IC3.5 RA6.3 | length 4.1
  Bottom Layer w0.45: RA6.3@97.875,56.95 97.892,56.933 97.892,52.842 IC3.5@97.91,52.825
7SEG3D: IC3.4 RA6.4 | length 4.3
  Bottom Layer w0.45: IC3.4@96.64,52.825 96.64,54.665 97.075,55.1 RA6.4@97.075,56.95
7SEG3E: IC3.3 RA5.1 | length 4.3
  Bottom Layer w0.45: RA5.1@94.9,56.95 94.9,55.35 95.37,54.88 IC3.3@95.37,52.825
7SEG3F: IC3.2 RA5.2 | length 4.1
  Bottom Layer w0.45: IC3.2@94.1,52.825 RA5.2@94.1,56.95
7SEG3G: IC3.1 RA5.3 | length 4.3
  Bottom Layer w0.45: IC3.1@92.83,52.825 92.83,54.655 93.3,55.125 RA5.3@93.3,56.95
7SEG3P: IC3.15 RA5.4 | length 10.7
  Bottom Layer w0.45: RA5.4@92.5,56.95 92.5,55.475 91.9,54.875 91.9,51.25 94.1,49.05 IC3.15@94.1,47.401
+3.3: C30.1 C31.1 D2.2 F1.2 J3.4 P2.1 R4.2 R29.2 | length 59
  Top Layer w0.8: v1(56.293,23.188) 56.296,23.185 56.296,18.375 56.296,16.079 61.45,10.925 v1(64.6,10.925)
  Bottom Layer w0.45: 62.668,17.693 64.875,19.9 J3.4@77.625,19.9
  Bottom Layer w0.8: v1(56.293,23.188) F1.2@56.293,25.937 R4.2@58.655,25.937 ; v1(56.3,18.375) C31.1@57.766,18.375 ; C31.1@57.775,18.384 57.833,18.326 58.949,18.326 59.219,18.056 60.351,18.056 60.55,17.856 C30.1@60.55,17.7 ; C30.1@60.55,17.693 62.668,17.693 ; v1(64.6,10.925) 64.604,10.921 64.604,9.8 ; R29.2@64.608,8.015 64.604,8.019 64.604,9.8 ; P2.1@72.91,6.565 72.91,8.615 71.725,9.8 64.604,9.8
+3.3v: C15.1 C17.1 F2.2 FB1.1 R2.1 R6.2 R8.2 R10.2 R11.2 R12.2 R18.2 U1.28 | length 95.6
  Top Layer w1: v1(110.525,46.975) 110.525,44.325 109.675,43.475 104.7,43.475 104,44.175 v1(104,46.325) 104,51.2 105.725,52.925 v1(128.375,52.925)
  Bottom Layer w0.26: v1(110.525,46.975) 111.6,46.975 113.175,45.4 U1.28@113.175,44.005
  Bottom Layer w1: C17.1@103.989,44.27 103.989,46.314 v1(104,46.325) ; R18.2@119.443,69.725 119.443,67.932 120.525,66.85 124.756,66.85 F2.2@126.473,65.133 128.7,62.906 128.7,48.286 ; FB1.1@126.421,48.286 128.7,48.286 ; C15.1@127.414,32.019 127.61,32.019 127.71,32.119 R8.2@127.71,44.611 127.71,46.36 128.7,47.35 128.7,48.286
+5: C3.2 C12.2 IC1.10 IC1.16 IC2.10 IC2.16 IC3.10 IC3.16 J2.1 JP1.1 JP2.2 R27.1 SP1.1 U2.1 U2.3 U3.1 U3.3 | length 405.2
  Top Layer w1.2: v1(17.8,30.45) 22.9,30.45 26.35,27 38.475,27 ; v1(36.1,45.45) v1(36.1,44.15) 36.1,36.275 40.35,32.025 ; v1(41.15,21.525) 39.3,21.525 38.475,22.35 v1(38.475,25.6) 38.475,27 ; v1(59.175,47.4) v1(58.125,47.4) 44.075,47.4 40.35,43.675 ; v1(68.525,49.35) 82.65,49.35 ; v1(91.125,47.3) v1(89.85,47.3) 84.7,47.3 82.65,49.35 ; v1(117.175,67.225) 113.475,63.525 v1(110.75,63.525) 108.325,63.525 106.975,64.875 106.975,72.222 106.272,72.925 79.85,72.925 ; 38.475,27 40.35,28.875 40.35,32.025 ; 40.35,32.025 40.35,43.675 ; 40.35,43.675 40.35,64.225 49.05,72.925 79.85,72.925 ; 79.85,72.925 82.65,70.125 82.65,49.35
  Bottom Layer w0.56: C12.2@114.548,63.509 115.959,63.509 116.14,63.69 U3.1@117.185,63.69
  Bottom Layer w0.6: v1(36.1,45.45) IC1.10@36.1,47.413 ; v1(38.475,25.6) 38.479,25.604 39.828,25.604 39.832,25.6 40.85,25.6 41.433,25.017 U2.3@42.482,25.017 ; v1(41.15,21.525) 41.15,22.725 41.542,23.117 U2.1@42.482,23.117 ; v1(59.175,47.4) 59.188,47.413 IC2.16@60.905,47.413 ; IC2.10@68.525,47.413 v1(68.525,49.35) ; v1(91.125,47.3) 92.805,47.3 92.83,47.325 IC3.16@92.83,47.401 ; IC3.10@100.45,47.401 100.45,49.175 ; U3.3@117.18,65.595 v1@117.18,67.22
  Bottom Layer w0.8: 100.45,49.175 103.25,51.975 103.25,61.4 105.359,63.509 C12.2@114.548,63.509
  Bottom Layer w1.2: J2.1@4.805,51.512 4.805,53.88 6.15,55.225 6.15,62.95 7.325,64.125 17.075,64.125 18.375,62.825 18.375,44.25 ; SP1.1@6.538,60.858 SP1.1@6.538,61.135 ; JP2.2@12.244,5.656 12.117,5.656 9.748,8.025 5.9,8.025 4.05,9.875 4.05,16.75 6.65,19.35 6.65,28.975 8.125,30.45 12.3,30.45 ; JP1.1@14.45,42.075 14.45,37 ; v1(17.8,30.45) v1(16.575,30.45) v1(15.275,30.45) 12.3,30.45 ; 21.412,47.288 18.375,44.25 ; 12.3,30.45 14.45,32.6 14.45,37 ; 14.45,37 18.375,40.925 18.375,44.25
  Bottom Layer w1.225: 21.412,47.288 27.262,47.288
  other v1: 68.525,50.55
+12: F3.1 J1.1 Q1.K | length 13.8
  Bottom Layer w1.5: J1.1@12.5,12.875 J1.1@12.5,13.675 J1.1@12.5,14.075 J1.1@12.5,14.525 12.5,16.3 14.224,18.024 14.224,19.4 Q1.K@14.224,20.869 ; Q1.K@14.224,20.519 14.224,20.931 F3.1@17.563,24.269
ACT: R22.1 RJ1.10 | length 25.2
  Bottom Layer w0.5: R22.1@99.806,16.931 99.806,16.75 100.056,16.5 104.05,16.5 110.8,9.75 110.8,5.025 112.075,3.75 RJ1.10@116.65,3.75
BUZER: J3.12 R32.2 | length 199.3
  Top Layer w0.45: v1(80.025,30.65) 80.025,29.525 80.825,28.725 v1(88.225,28.725)
  Bottom Layer w0.45: R32.2@9.711,53.068 7.843,53.068 6.975,52.2 6.975,48.625 8.325,47.275 10.6,47.275 11.275,46.6 11.275,42 10.275,41 2.975,41 1.95,42.025 1.95,54.675 3.777,56.502 3.777,63.877 6.325,66.425 22.75,66.425 24.15,67.825 24.15,72.475 25.75,74.075 83.275,74.075 88.225,69.125 v1(88.225,28.725) ; v1(80.025,30.65) 80.13,30.545 80.13,29.52 81.675,27.975 J3.12@81.675,24.75